# Altium PCB mchf_pro_ui.PcbDoc (part 5 of 7)
Units mil, origin at the board's own origin, x right, y up, seen from the top; angles counter-clockwise.
Board outline 7877.73 x 5661.04 mil, 2 copper layers (Top Layer, Bottom Layer); 345 components, 345 nets, 1318 pads, 783 vias.
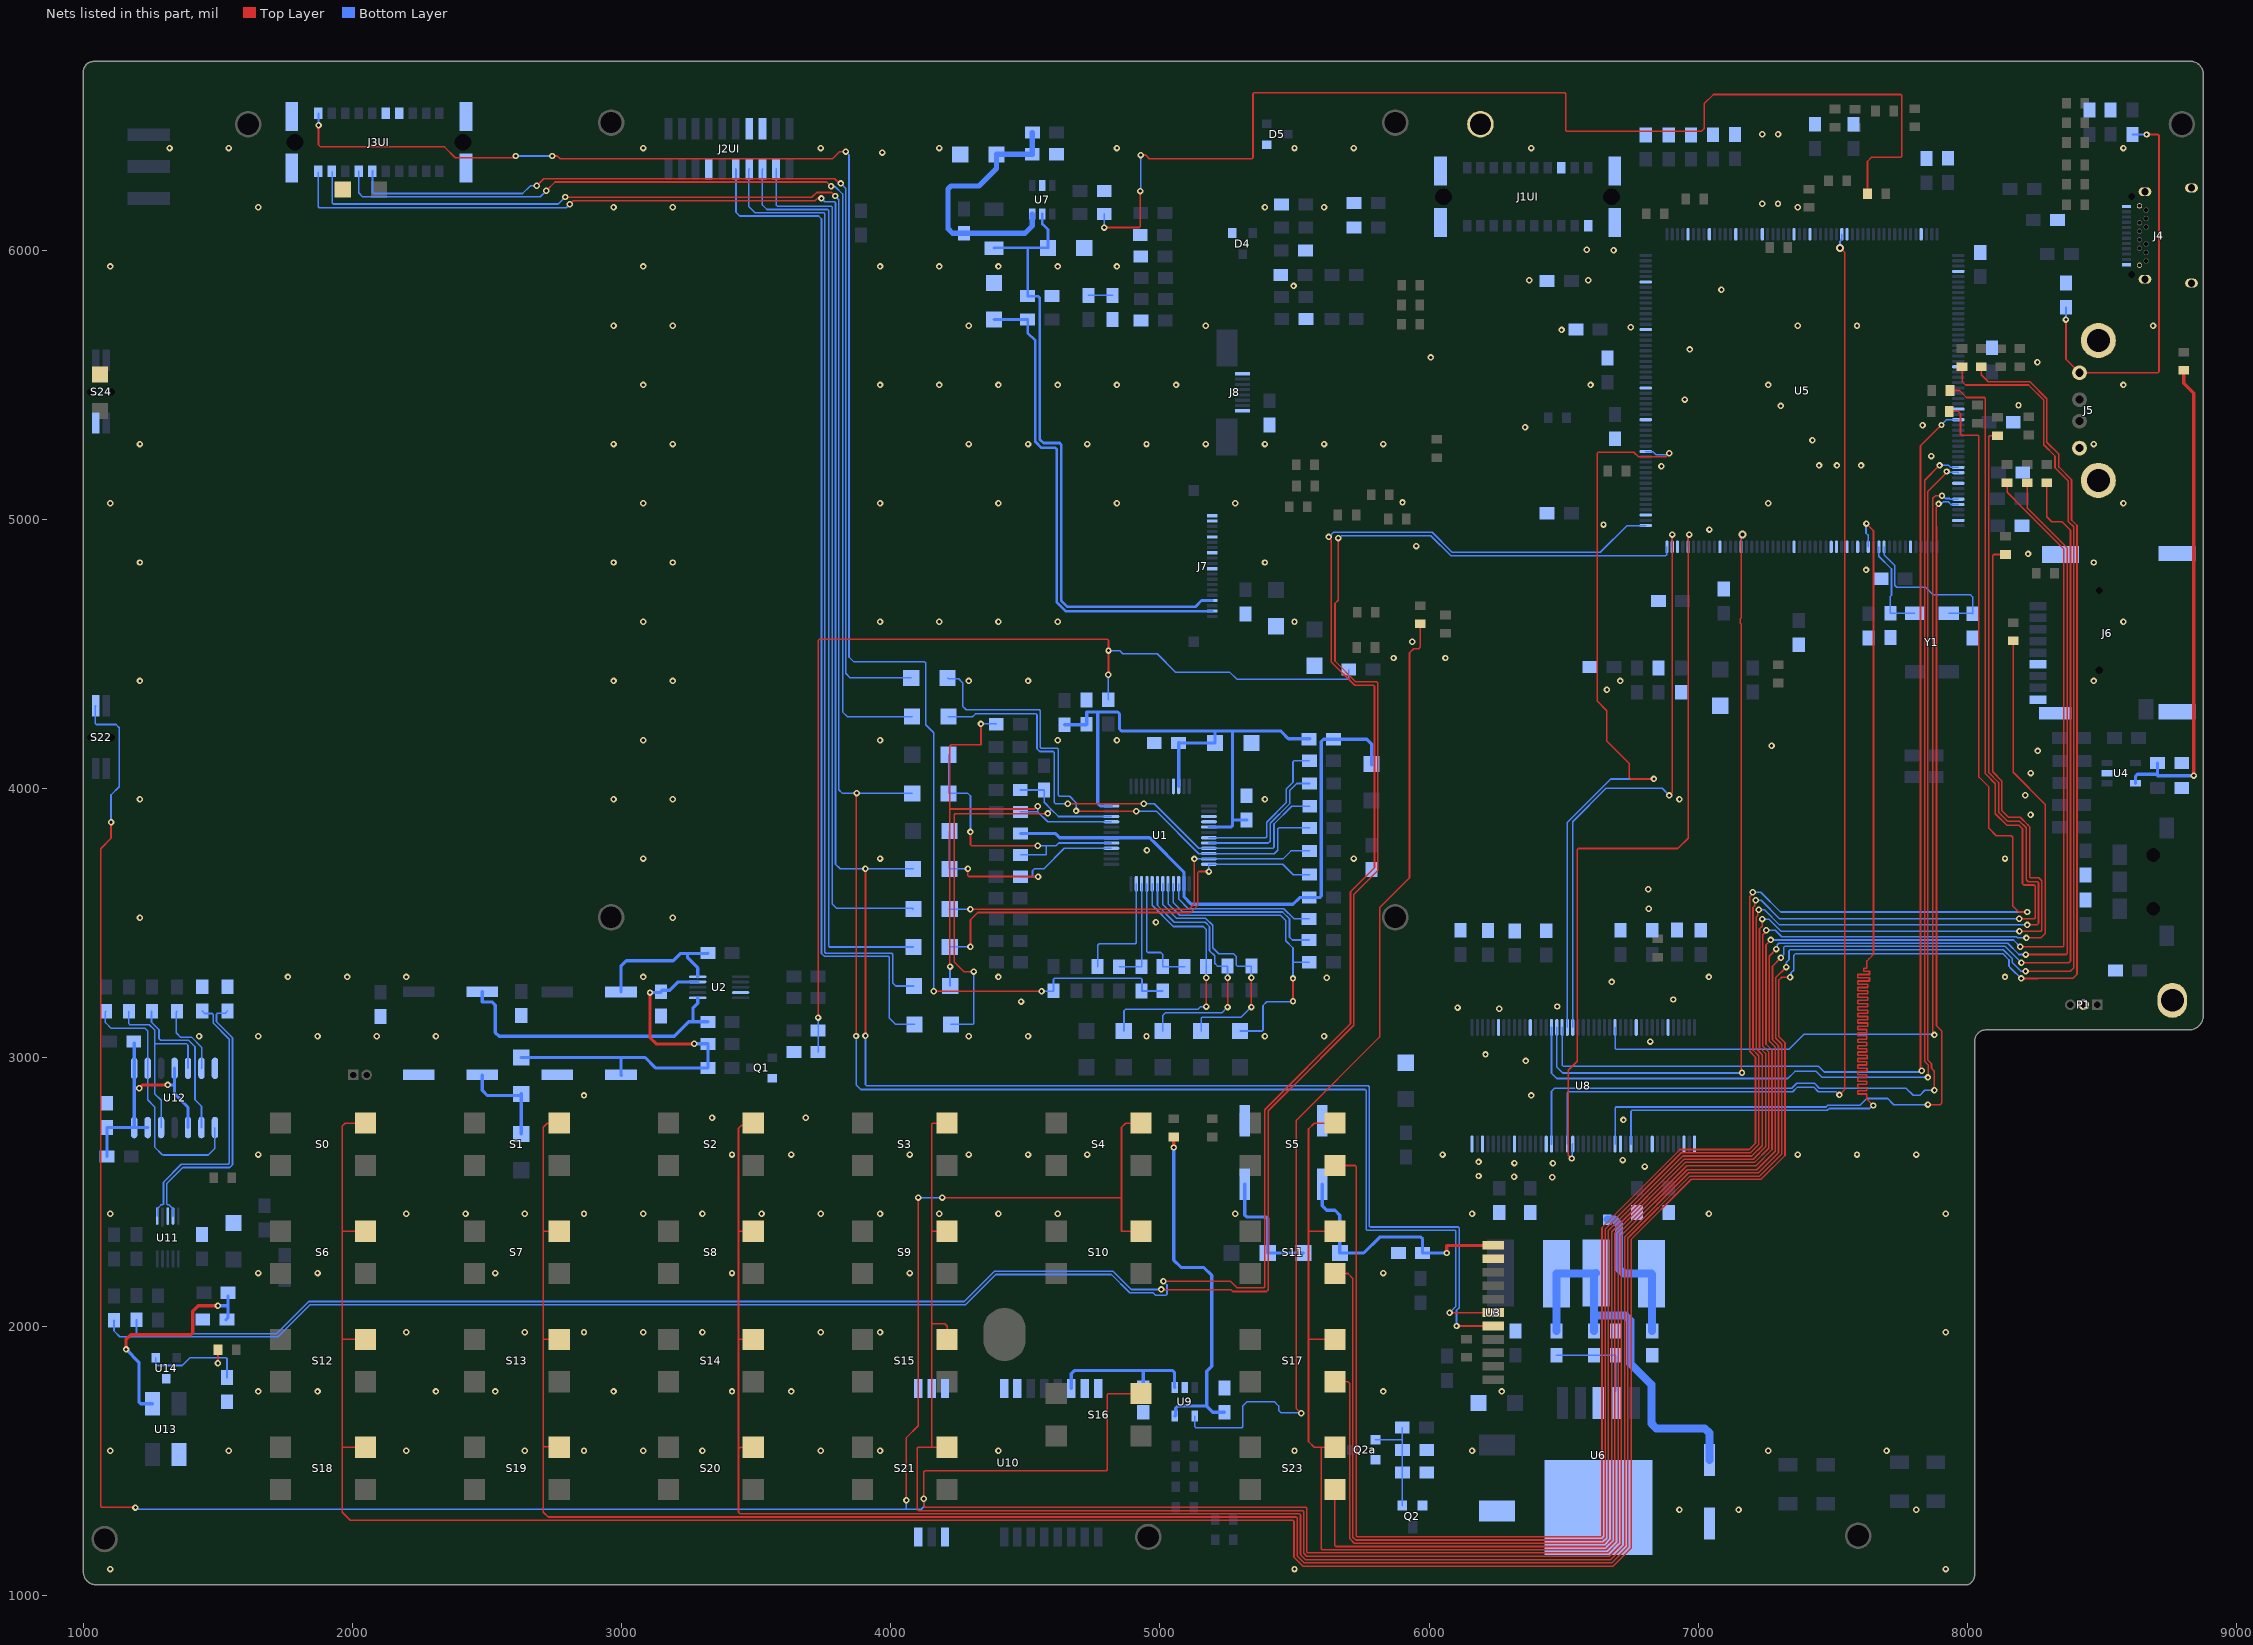
[diagram p4: the nets of this part, all layers, seen from the top]

## Via types
v1: diameter 24, hole 12, Top Layer to Bottom Layer, 779 vias
v2: diameter 30, hole 15, Top Layer to Bottom Layer, 4 vias

## Nets (pads, with @x,y where several pads share a name; then routed paths per layer and width w, separated by ;. In a path a pad name is that pad's centre, name@x,y a point inside that pad or via, vN(x,y) a via of type N, cw(c..) or ccw(c..) an arc to the next point about the centre after c; other vN are vias at no path point) (continued)
FMC_D31: U5.14 U8.56 | length 4731.7
  Top Layer w6: v1(7624.86,4984.78) 7651.35,4958.29 7651.35,3383.92 7634.51,3367.08 7626.52,3359.09 7626.52,3333.02 7614.88,3333.02 7614.88,3321.02 7636.46,3321.02 7636.46,3309.02 7592.45,3309.02 7592.45,3297.02 7636.46,3297.02 7636.46,3285.02 7592.45,3285.02 7592.45,3273.02 7630.42,3273.02 7630.42,3261.02 7592.45,3261.02 7592.45,3249.02 7630.37,3249.02 7630.37,3237.02 7592.45,3237.02 7592.45,3225.02 7630.37,3225.02 7630.37,3213.02 7592.45,3213.02 7592.45,3201.02 7630.37,3201.02 7630.37,3189.02 7592.45,3189.02 7592.45,3177.02 7630.37,3177.02 7630.37,3165.02 7592.45,3165.02 7592.45,3153.02 7630.37,3153.02 7630.37,3141.02 7592.45,3141.02 7592.45,3129.02 7630.37,3129.02 7630.37,3117.02 7592.45,3117.02 7592.45,3105.02 7626.52,3105.02 7626.52,3093.02 7592.45,3093.02 7592.45,3081.02 7626.52,3081.02 7626.52,3069.02 7592.45,3069.02 7592.45,3057.02 7626.81,3057.02 7626.81,3045.02 7592.45,3045.02 7592.45,3033.02 7626.52,3033.02 7626.52,3021.02 7592.45,3021.02 7592.45,3009.02 7628.5,3009.02 7628.5,2997.02 7592.45,2997.02 7592.45,2985.02 7626.52,2985.02 7626.52,2973.02 7592.45,2973.02 7592.45,2961.02 7627.01,2961.02 7627.01,2949.02 7592.45,2949.02 7592.45,2937.02 7626.52,2937.02 7626.52,2925.02 7592.45,2925.02 7592.45,2913.02 7626.52,2913.02 7626.52,2901.02 7592.45,2901.02 7592.45,2889.02 7626.52,2889.02 7626.52,2877.02 7592.45,2877.02 7592.45,2865.02 7626.52,2865.02 7626.52,2862.02 7626.52,2846.23 v1(7650.25,2822.51)
  Bottom Layer w6: U8.56@6750.24,2679.53 6750.24,2801.24 6753.76,2804.76 7479.88,2804.76 7486.48,2811.35 7637.73,2811.35 7648.89,2822.51 v1(7650.25,2822.51) ; v1(7624.86,4984.78) 7623.52,4983.44 7623.52,4949.6 7631.86,4941.27 U5.14@7631.86,4898.21
FMC_NBL0: U5.197 U8.16 | length 3976.8
  Top Layer w6: v1(7853.55,2926.78) 7855.05,2928.28 7855.05,2972.54 7841.47,2986.12 7841.47,5145.64 v1(7896.76,5200.93)
  Bottom Layer w6: U8.16@6454.97,3112.61 6454.97,2942.18 6474.4,2922.74 7332.93,2922.74 7359.34,2949.16 7438.8,2949.16 7461.17,2926.78 7845.26,2926.78 v1@7853.55,2935.07 ; v1(7896.76,5200.93) 7929.64,5200.93 7937.09,5193.48 U5.197@7966.5,5193.48
FMC_NBL1: U5.198 U8.71 | length 4040.1
  Top Layer w6: v1(7877.52,2878.72) 7877.52,2950.07 7867.05,2960.54 7867.05,2977.51 7853.47,2991.1 7853.47,5104.5 7922.76,5173.8 v1(7922.76,5178.11)
  Bottom Layer w6: U8.71@6454.97,2679.53 6454.97,2874.96 6466.36,2886.36 7347.45,2886.36 7366.26,2905.16 7431.88,2905.16 7449.97,2887.07 7772.35,2887.07 7798.86,2860.55 7823.81,2860.55 7841.98,2878.72 v1(7877.52,2878.72) ; v1(7922.76,5178.11) 7925.96,5174.91 7965.39,5174.91 U5.198@7966.5,5173.8
FMC_NBL2: U5.203 U8.28 | length 3389.5
  Top Layer w6: v1(7877.52,3084.57) 7877.52,3089.44 7872.01,3094.96 7872.01,5078.62 7881.42,5088.03 v1(7905.81,5088.03)
  Bottom Layer w6: U8.28@6691.19,3112.61 6691.19,3035.58 6694.7,3032.07 7338.81,3032.07 7394.52,3087.78 7873.52,3087.78 v1@7877.52,3083.78 ; v1(7905.81,5088.03) 7907.95,5088.03 7918.32,5077.66 7933.91,5077.66 7936.2,5075.37 U5.203@7966.5,5075.37
FMC_NBL3: U5.204 U8.59 | length 3693.7
  Top Layer w6: v1(7853.55,2825.76) 7899.55,2825.76 7905.29,2831.5 7905.29,3099.07 7885.45,3118.92 7885.45,4974.62 7884.01,4976.06 7884.01,5045.27 7893.01,5054.27 v1(7893.01,5057.78)
  Bottom Layer w6: U8.59@6691.19,2679.53 6691.19,2813.24 6694.7,2816.76 7474.73,2816.76 7481.33,2823.35 7601.12,2823.35 7626.01,2848.24 7704.03,2848.24 7726.52,2825.76 v1(7853.55,2825.76) ; v1(7893.01,5057.78) 7896.45,5061.23 7907.11,5061.23 7911.54,5065.66 7928.94,5065.66 7938.91,5055.69 U5.204@7966.5,5055.69
FMC_SDCKE0: U5.48 U8.67 | length 2829.8
  Top Layer w6: v1(6529.76,2625.59) 6529.76,2625.86 6517.54,2638.09 6517.54,2953.68 6550.52,2986.66 6550.52,3773.9 6554.04,3777.41 6924.15,3777.41 6962.57,3815.83 6962.57,4940.37 6963.36,4940.37 v1(6966.88,4943.89)
  Bottom Layer w6: v1(6529.76,2625.59) 6532.59,2628.42 6532.59,2678.42 U8.67@6533.71,2679.53 ; U5.48@6962.56,4898.21 6963.68,4899.32 6963.68,4940.68 v1(6966.88,4943.89)
FMC_SDCLK: U5.138 U8.68 | length 4438.6
  Top Layer w6: v1(7524.52,2861.76) 7545.21,2882.44 7545.21,5991.1 v2(7527.52,6008.78)
  Bottom Layer w6: U8.68@6514.02,2679.53 6514.02,2870.24 6517.54,2873.76 7351.82,2873.76 7368.89,2890.82 7429.25,2890.82 7446.32,2873.76 7512.01,2873.76 7524.01,2861.76 v1(7524.52,2861.76) ; v2(7527.52,6008.78) 7526.77,6009.53 7526.77,6033.85 7533.43,6040.51 U5.138@7533.43,6059.62
FMC_SDNCAS: U5.188 U8.18 | length 4003.2
  Top Layer w6: v1@7825.76,2945.78 7825.76,3800.27 7825.76,5273.65 v1@7905.21,5353.09
  Bottom Layer w6: U8.18@6494.34,3112.61 6494.34,2972.43 6497.85,2968.92 7445.99,2968.92 7467.84,2947.07 7828.81,2947.07 v1@7833.52,2951.78 ; v1(7904.04,5350.96) 7904.04,5351.92 7922.76,5370.65 U5.188@7966.5,5370.65
  other v1: 7830.51,2951.91
FMC_SDNE0: U5.51 U8.20 | length 2204.9
  Top Layer w6: v1(6892.35,3974.57) 6903.51,3985.73 v1(6903.51,4943.89)
  Bottom Layer w6: U8.20@6533.71,3112.61 6533.71,3877.23 6657.26,4000.78 6866.14,4000.78 v1(6892.35,3974.57) ; U5.51@6903.51,4898.21 v1(6903.51,4943.89)
FMC_SDNRAS: U5.67 U8.19 | length 2875.1
  Top Layer w6: v1(6835.5,4035.78) 6749.52,4035.78 6743.45,4041.86 6743.45,4093.47 6660.11,4176.81 6660.11,4289.44 6625.52,4324.03 6625.52,5246.66 6629.04,5250.18 6760.56,5250.18 6777.98,5232.75 6879.78,5232.75 v1(6892.76,5245.73)
  Bottom Layer w6: U8.19@6514.02,3112.61 6514.02,3874.52 6675.29,4035.78 v1(6835.5,4035.78) ; U5.67@6805.08,5252.54 6805.43,5252.19 6831.54,5252.19 6843.97,5239.76 6881.91,5239.76 6887.89,5245.73 v1(6892.76,5245.73)
FMC_SDNWE: U5.38 U8.17 | length 2876.6
  Top Layer w6: v2@7159.42,4935.21 7159.62,4935 7159.62,4928.57 7159.42,4928.37 7159.42,4634.12 7156.79,4631.49 7156.79,4614.09 7159.42,4611.46 7159.42,2947.07 v1(7162.74,2943.74)
  Bottom Layer w6: U8.17@6474.65,3112.61 6474.65,2965.62 6496.91,2943.36 7162.35,2943.36 v1(7162.74,2943.74) ; U5.38@7159.42,4898.21 v2@7159.42,4935.21
  other v2: 7164.21,4943.89
GND: C1.2 C14.1 C15.1 C16.2 C17.2 C18.1 C21.1 C21a.2 C21b.2 C22.1 C23.1 C24.2 C25.2 C26.1 C27.1 C28.2 C29.1 C30.2 C31.2 C32.2 C33.1 C34.2 C35.2 C37.2 C38.2 C39.2 C41.1 C42.2 C43.2 C44.2 C45.1 C46.1 C47.2 C48.1 C49.1 C50.2 C51.1 C52.1 C53.1 C54.2 C55.2 C56.1 C61.1 C62.2 CC5.2 CC36.2 CC46.2 Cp7.2 Cp17.2 Cp29.2 CP43.1 CP43E.2 Cp44.2 CP44E.2 Cp49.2 Cp56.2 Cp74.2 Cp80.2 CP89.1 Cp100.2 Cp108.2 Cp114.2 Cp117.2 CP119.2 CP119E.2 Cp133.2 CP140.2 CP152.1 Cp155.2 Cp161.2 Cp179.2 Cp187.2 CP199.1 Cp208.2 Cr1.2 Cr3.2 Cr9.2 Cr15.2 Cr29.2 Cr35.2 Cr41.2 Cr43.2 Cr49.2 Cr55.2 Cr75.2 Cr81.2 D1.1 D2.1 D3.1 D4.1 D5.1 D8.1 J1UI.A3 J1UI.A11 J1UI.MP1 J1UI.MP2 J1UI.MP3 J1UI.MP4 J2UI.A3 J2UI.A4 J2UI.A17 J3UI.A16 J3UI.A17 J3UI.MP1 J3UI.MP2 J3UI.MP3 J3UI.MP4 J4.A1 J4.A12 J4.B1 J4.B12 J4.MH3 J4.MH4 J4.MH5 J4.MH6 J5.1 J5.5 J5.6 J6.6 J6.9 J6.11 J6.12 J6.13 J6.14 J7.10 J7.13 J7.16 J7.19 J7.20 J8.1 J8.8 LD1.2 LD2.2 LD6.2 M1.1 M58a.2 M58b.2 P1.2 pad. pad.1@6191.04,6468.5 Q1.2 Q2.2 Q2a.2 R17.2 R18.1 R22.1 R23.2 R34.1 R35.2 R38.2 R43.1 R46.1 S24.3 U1.3 U1.4 U1.45 U2.4 U3.2 U4.2 U5.6 U5.16 U5.18 U5.20 U5.21 U5.28 U5.42 U5.50 U5.55 U5.73 U5.79 U5.90 U5.99 U5.109 U5.113 U5.118 U5.123 U5.129 U5.132 U5.139 U5.153 U5.160 U5.178 U5.186 U5.200 U5.207 U6.3 U7.2 U8.6 U8.12 U8.32 U8.38 U8.44 U8.46 U8.52 U8.58 U8.72 U8.78 U8.84 U8.86 U9.2 U10.1 U10.2 U10.3 U10.4 U10.5 U10.10 U10.11 U10.20 U10.22 U11.8 U12.7 U13.2 U14.3
  other v1: 1100,1100 5500,1100 7920,1100 6930,1320 7150,1320 7810,1320 1100,1540 1540,1540 2200,1540 2640,1540 2860,1540 3080,1540 3300,1540 3740,1540 3960,1540 4400,1540 5500,1540 6160,1540 7260,1540 7700,1540 1650,1760 1870,1760 2310,1760 2530,1760 2970,1760 3410,1760 3630,1760 5830,1760 6270,1760 2200,1980 2640,1980 2860,1980 3080,1980 3300,1980 3740,1980 3960,1980 7920,1980 1650,2200 1870,2200 2530,2200 3410,2200 4070,2200 5830,2200 1100,2420 2200,2420 2420,2420 2640,2420 2860,2420 3080,2420 3300,2420 3520,2420 3740,2420 3960,2420 4180,2420 4400,2420 4620,2420 5280,2420 6160,2420 7040,2420 7920,2420 6458.1,2556.24 6315.97,2557.86 6184.02,2560.52 6801.02,2595.37 6460.02,2607.59 6317.17,2608.63 6183.97,2612.61 6719.45,2619.57 1650,2640 3410,2640 3630,2640 4070,2640 4290,2640 4510,2640 4730,2640 6050,2640 7370,2640 7590,2640 7810,2640 6722.34,2768.76 3336.05,2776.58 3683.71,2776.58 2860,2860 6380,2860 6359.49,2988.23 6209.64,3012.23 6821.98,3059.89 1430,3080 1650,3080 1870,3080 2090,3080 2310,3080 4290,3080 4510,3080 4950,3080 5390,3080 5610,3080 6260.51,3182.06 6106.06,3186.35 6476.64,3190.28 4484.15,3208.4 6907.32,3216.23 6678.92,3281.6 5619.97,3297.3 1760,3300 1980,3300 2200,3300 3080,3300 4400,3300 7040,3300 8140,3300 4985.2,3503.28 1210,3520 3190,3520 6816.2,3553.89 6814.64,3626.09 3080,3740 3960,3740 5720,3740 8140,3740 4951.56,3771.22 8235.11,3902.44 1210,3960 2970,3960 3190,3960 5390,3960 6930,3960 8215.2,3975.39 8235.66,4057.57 8261.81,4140.07 7272.43,4159.12 3080,4180 3960,4180 4620,4180 4840,4180 6660.9,4366.98 1210,4400 2970,4400 3190,4400 4290,4400 4510,4400 6710,4400 8470,4400 5868.28,4485.11 6060.93,4485.11 5937.36,4545.76 3080,4620 3960,4620 4180,4620 4400,4620 4620,4620 5500,4620 8580,4620 7623.92,4812.32 1210,4840 2970,4840 3190,4840 5390,4840 8470,4840 8225.87,4872 5952.6,4901.18 7041.85,4962.24 6648.11,4980.89 1100,5060 3080,5060 3960,5060 4400,5060 4840,5060 5280,5060 7260,5060 8580,5060 5901.26,5063.07 6863.26,5197.82 7449.33,5200.93 7515.52,5200.93 7605.07,5200.93 7865.58,5235.34 1210,5280 2970,5280 3190,5280 4290,5280 4510,5280 4730,5280 4950,5280 5170,5280 5390,5280 5610,5280 5830,5280 8470,5280 7424.29,5294.35 6356.92,5342.27 7833.71,5349.8 7307.05,5421.86 8190.14,5423.94 6949.99,5445.43 3080,5500 3960,5500 4180,5500 4400,5500 4620,5500 4840,5500 5060,5500 6600,5500 7260,5500 8580,5500 8260.4,5584.47 6006.34,5602.22 6968.52,5631.74 6492.19,5704.21 6749.2,5714.52 2970,5720 3190,5720 4290,5720 5170,5720 7370,5720 7590,5720 8690,5720 7086.37,5853.17 5496.68,5867.81 6372.55,5888.41 6591.4,5888.41 1100,5940 3080,5940 3960,5940 4180,5940 4400,5940 4620,5940 4840,5940 6685.72,6000.62 6586.16,6001.82 1650,6160 2970,6160 3190,6160 5390,6160 5610,6160 7370,6160 7237.74,6172.93 7296.52,6173.07 3968.5,6363.19 1320,6380 1540,6380 3080,6380 3740,6380 4180,6380 4840,6380 5500,6380 5720,6380 6380,6380 8580,6380 7238.16,6431.19 7296.9,6431.21
IMD3_TEST_N: M58b.1 U11.6 | length 1036.6
  Bottom Layer w6: U11.6@1274.04,2411.64 1274.04,2439.2 1287.96,2453.12 1294.05,2453.12 1297.57,2456.64 1297.57,2537.69 1363.89,2604.02 1538.43,2604.02 1541.94,2607.53 1541.94,3068.98 1482.33,3128.59 1482.33,3160.77 1478.82,3164.29 1450.7,3164.29 M58b.1@1441.57,3173.42
IMD3_TEST_P: M58a.1 U11.9 | length 1037
  Bottom Layer w6: U11.9@1333.09,2411.64 1333.09,2439.2 1319.17,2453.12 1313.08,2453.12 1309.57,2456.64 1309.57,2532.72 1368.86,2592.02 1543.4,2592.02 1553.94,2602.56 1553.94,3073.95 1494.33,3133.56 1494.33,3161.39 1497.84,3164.91 1526.57,3164.91 M58a.1@1535.09,3173.42
JC_CLK1: M56.2 U12.5 U12.12 | length 737
  Bottom Layer w6: M56.2@1169.12,3172.67 1169.12,3126.34 1172.63,3122.82 1244.95,3122.82 1264.4,3103.38 1264.4,2865.92 1288.72,2841.6 U12.12@1288.72,2740.46 ; 1264.4,3052.46 1382.86,3052.46 1388.72,3046.6 U12.5@1388.72,2960.46
JC_CLK2: M58.2 U12.6 | length 277.7
  Bottom Layer w6: M58.2@1347.8,3172.67 1344.57,3169.43 1344.57,3092.4 1360.37,3076.6 1401.36,3076.6 1440.09,3037.87 1440.09,2961.82 U12.6@1438.72,2960.46
JC_CLK3: M57.2 U12.9 | length 570.2
  Bottom Layer w6: M57.2@1254.46,3172.67 1253.01,3171.21 1253.01,3131.74 1269.73,3115.02 1281.01,3103.74 1281.01,3070.96 1287.37,3064.6 1390.62,3064.6 1414.53,3040.69 1414.53,2843.62 1438.72,2819.43 U12.9@1438.72,2740.46
JC_CLK4: M55.2 U12.2 U12.8 | length 978.9
  Bottom Layer w6: M55.2@1083.77,3172.67 1081.86,3170.76 1081.86,3130.46 1102.75,3109.57 1228.8,3109.57 1238.72,3099.65 U12.2@1238.72,2960.46 1238.72,2843.83 1264.4,2818.15 1264.4,2668.11 1293.27,2639.24 1296.56,2639.24 1297.34,2638.46 1463.91,2638.46 1488.72,2663.27 U12.8@1488.72,2740.46
KEYPAD_X1: M13.1 S0.3 S6.3 S12.3 S18.3 | length 13012.6
  Top Layer w6: S18.3@2047.64,1552.56 1961.61,1552.56 ; S12.3@2047.64,1953.54 1961.61,1953.54 ; S6.3@2047.64,2355.51 1961.61,2355.51 ; S0.3@2047.64,2756.85 1972.4,2756.85 1961.61,2746.06 1961.61,2355.51 ; v1(7341.54,3299.09) 7341.28,3299.35 7310.52,3299.35 7299.9,3288.73 7299.9,3078.19 7322.39,3055.71 7322.39,2636.87 7233.62,2548.1 6974.41,2548.1 6750.57,2324.26 6750.57,1177.25 6684.44,1111.12 5530.53,1111.12 5498.07,1143.57 5498.07,1277.84 5494.56,1281.35 1991.29,1281.35 1961.61,1311.02 1961.61,1552.56 ; M13.1@8051.83,5567.6 8051.83,5537.46 8077.58,5511.71 8232.56,5511.71 8295.57,5448.7 8295.57,5286.75 8340.32,5242 8340.32,5194.55 8386.92,5147.95 8386.92,4997.64 8407.25,4977.3 8407.25,3310.32 8391.63,3294.7 8261.69,3294.7 8261.45,3294.45 v1(8200.2,3294.45) ; 1961.61,1552.56 1961.61,1953.54 ; 1961.61,1953.54 1961.61,2355.51
  Bottom Layer w6: v1(7341.54,3299.09) 7344.98,3302.53 7344.98,3315.39 7354.81,3325.23 7354.81,3380.12 7361.52,3386.83 8131.27,3386.83 8154.71,3363.39 8154.71,3339.95 8163.69,3330.97 v1(8200.2,3294.45)
KEYPAD_X2: M35.1 S1.3 S7.3 S13.3 S19.3 | length 12173.3
  Top Layer w6: S19.3@2768.31,1552.56 2766.87,1554 2714,1554 2709,1559 ; S13.3@2768.31,1953.54 2709,1953.54 ; S7.3@2768.31,2355.51 2709,2355.51 ; S1.3@2768.31,2756.85 2767.91,2756.45 2723.45,2756.45 2709,2742 2709,2355.51 ; v1(7326.77,3336.61) 7287.9,3297.74 7287.9,3072.85 7310.39,3050.36 7310.39,2641.84 7228.65,2560.1 6969.44,2560.1 6738.57,2329.23 6738.57,1182.22 6679.47,1123.12 5535.5,1123.12 5510.07,1148.54 5510.07,1289.84 5506.56,1293.35 2726.67,1293.35 2709,1311.02 2709,1559 ; M35.1@7980.54,5565.6 7980.54,5512.69 7993.53,5499.71 8227.59,5499.71 8283.57,5443.73 8283.57,5277.8 8325.84,5235.53 8325.84,5192.06 8374.92,5142.98 8374.92,4992.67 8395.25,4972.33 8395.25,3333.39 8382.88,3321.02 v1(8216.54,3321.02) ; 2709,1559 2709,1953.54 ; 2709,1953.54 2709,2355.51
  Bottom Layer w6: v1(7326.77,3336.61) 7327.42,3337.26 7327.42,3353.67 7337.51,3363.76 7337.51,3398.03 7341.03,3401.54 8133.74,3401.54 8166.71,3368.58 8166.71,3354.1 8199.31,3321.49 8216.06,3321.49 v1(8216.54,3321.02)
KEYPAD_X3: M28.1 S2.3 S8.3 S14.3 S20.3 | length 10699.2
  Top Layer w6: S20.3@3488.78,1552.56 3443.56,1552.56 3442.49,1551.49 3437.51,1551.49 3434,1555 ; S14.3@3488.78,1953.54 3434,1953.54 ; S8.3@3488.78,2355.51 3434,2355.51 ; S2.3@3488.78,2756.85 3479.85,2747.92 3443.92,2747.92 3434,2738 3434,2355.51 ; v1(7307.21,3371.09) 7275.9,3339.78 7275.9,3066.9 7298.39,3044.42 7298.39,2646.81 7223.68,2572.1 6964.47,2572.1 6726.57,2334.2 6726.57,1187.19 6674.5,1135.12 5540.47,1135.12 5522.07,1153.52 5522.07,1301.84 5518.56,1305.35 3439.67,1305.35 3434,1311.02 3434,1555 ; v1(8201.14,3352.82) 8377.25,3352.82 8383.25,3358.82 8383.25,4959.61 8351.83,4991.04 8313.96,4991.04 8294.86,5010.14 M28.1@8294.86,5136.62 ; 3434,1555 3434,1953.54 ; 3434,1953.54 3434,2355.51
  Bottom Layer w6: v1(7307.21,3371.09) 7307.21,3373.3 7317.51,3383.61 7317.51,3410.03 7321.02,3413.54 8140.42,3413.54 v1(8201.14,3352.82)
KEYPAD_X4: M29.1 S3.3 S9.3 S15.3 S21.3 | length 10111.6
  Top Layer w6: S21.3@4209.25,1552.56 4209.21,1552.6 4154.86,1552.6 ; S15.3@4209.25,1953.54 4209.25,2001.75 4200,2011 4152.46,2011 ; S9.3@4209.25,2355.51 4152.46,2355.51 ; S3.3@4209.25,2756.85 4155.98,2756.85 4152.46,2753.34 4152.46,2355.51 ; v1(7290.35,3403.78) 7263.9,3377.33 7263.9,3061.93 7286.39,3039.45 7286.39,2652.46 7218.03,2584.1 6959.5,2584.1 6714.57,2339.17 6714.57,1192.16 6669.53,1147.12 5545.44,1147.12 5534.07,1158.49 5534.07,1313.84 5530.56,1317.35 4101.83,1317.35 4098.32,1320.87 4098.32,1549.09 4101.83,1552.6 4154.86,1552.6 ; v1(8216.87,3383.37) 8367.74,3383.37 8371.25,3386.88 8371.25,4894.21 8222.85,5042.61 M29.1@8222.85,5136.62 ; 4152.46,2011 4152.46,1555 4154.86,1552.6 ; 4152.46,2011 4152.46,2355.51
  Bottom Layer w6: v1(7290.35,3403.78) 7293.8,3407.23 7293.8,3419.72 7299.62,3425.54 8149.71,3425.54 8191.88,3383.37 v1(8216.87,3383.37)
KEYPAD_X5: M14.1 S4.3 S10.3 S16.3 S22.1 | length 18183
  Top Layer w6: v1(1102.69,3874.65) 1102.62,3874.57 1102.62,3815.22 1064.2,3776.8 1064.2,1332.83 1067.72,1329.32 1192.34,1329.32 v1(1193.29,1328.37) ; v1(4058.07,1355.32) 4058.07,1588.58 4101.83,1632.35 v1(4101.83,2480.32) ; v1(4190.94,2480.32) 4857.28,2480.32 ; S16.3@4929.72,1751.97 4807.65,1751.97 4804.13,1748.45 4804.13,1469.07 4800.62,1465.55 4126.97,1465.55 4122.7,1461.28 v1(4122.7,1361.22) 4122.7,1335.17 4128.51,1329.35 5542.56,1329.35 5546.07,1325.84 5546.07,1163.46 5549.59,1159.94 6663.68,1159.94 6702.34,1198.6 6702.34,2343.91 6957.37,2598.94 7214.4,2598.94 7274.39,2658.93 7274.39,3028.55 7251.9,3051.04 7251.9,3419.93 v1(7269.51,3437.54) ; S10.3@4929.72,2355.51 4857.28,2355.51 4857.28,2480.32 ; S4.3@4929.72,2756.85 4872.99,2756.85 4857.28,2741.14 4857.28,2480.32 ; M14.1@8147.86,5136.62 8147.86,5100.63 8205.93,5042.56 8358.91,4889.58 8358.91,3415.92 8355.39,3412.4 v1(8196.61,3412.4)
  Bottom Layer w6: S22.1@1046.26,4308.07 1044.29,4306.1 1044.29,4241.7 1047.81,4238.19 1121.06,4238.19 1132.87,4226.38 1132.87,4006.52 1102.69,3976.34 v1(1102.69,3874.65) ; v1(1193.29,1328.37) 1198.16,1328.37 1204.67,1321.85 4058.07,1321.85 ; v1(4058.07,1355.32) 4058.07,1321.85 ; v1(4101.83,2480.32) v1(4190.94,2480.32) ; v1(4122.7,1361.22) 4122.7,1331.36 4113.19,1321.85 4058.07,1321.85 ; v1(7269.51,3437.54) 8171.47,3437.54 v1(8196.61,3412.4)
KEYPAD_X6: M5.1 S5.3 S11.3 S17.3 S23.3 | length 7919.1
  Top Layer w6: S23.3@5650.2,1552.56 5599.36,1552.56 ; S17.3@5650.2,1953.54 5552.17,1953.54 ; S11.3@5650.2,2355.51 5552.17,2355.51 ; S5.3@5650.2,2756.85 5573.78,2756.85 5552.17,2735.24 5552.17,2355.51 ; v1(7252.58,3473.7) 7252.58,3469.35 7239.9,3456.67 7239.9,3043.34 7262.39,3020.85 7262.39,2663.9 7209.43,2610.94 6952.4,2610.94 6690.34,2348.88 6690.34,1203.57 6658.71,1171.94 5602.88,1171.94 5599.36,1175.46 5599.36,1552.56 ; M5.1@8170.21,4549.21 8170.21,4060.24 8289.76,3940.69 8289.76,3461.63 8273.19,3445.07 v1(8219.59,3445.07) ; 5552.17,1953.54 5552.17,2355.51 ; 5552.17,1953.54 5552.17,1573.82 5573.43,1552.56 5599.36,1552.56
  Bottom Layer w6: v1(7252.58,3473.7) 7286.76,3473.7 7310.91,3449.54 8182.75,3449.54 8187.23,3445.07 v1(8219.59,3445.07)
KEYPAD_Y1: M12.1 S5.4 | length 8297.9
  Top Layer w6: S5.4@5650.2,2599.37 5725.37,2599.37 5728.89,2595.86 5728.89,1223.46 5732.4,1219.94 6638.82,1219.94 6642.34,1223.46 6642.34,2368.76 6932.52,2658.94 7189.55,2658.94 7212.89,2682.29 7212.89,3002.23 7191.55,3023.57 7191.55,3598.6 7202.94,3610 v1(7202.94,3614.87) ; M12.1@7932.96,5401.57 7966.26,5401.57 7968.97,5398.86 7974.76,5393.08 7974.76,5316.09 7978.27,5312.58 8039.59,5312.58 8043.1,5309.06 8043.1,4042.66 8080.17,4005.6 8080.17,3852.29 8107.45,3825.01 8163.18,3825.01 8168.96,3819.23 8168.96,3563.9 8191.47,3541.38 v1(8222.86,3541.38)
  Bottom Layer w6: v1(7202.94,3614.87) 7232.64,3614.87 7306.13,3541.38 v1(8222.86,3541.38)
KEYPAD_Y2: M33.1 S11.4 | length 8014.7
  Top Layer w6: S11.4@5650.2,2198.03 5698.57,2198.03 5716.89,2179.71 5716.89,1218.49 5727.43,1207.94 6643.79,1207.94 6654.34,1218.49 6654.34,2363.79 6937.49,2646.94 7194.52,2646.94 7224.89,2677.32 7224.89,3007.2 7203.55,3028.54 7203.55,3558.07 7210.49,3565.01 7210.49,3581.38 v1(7213.93,3584.82) ; M33.1@7935.58,5479.05 7970.89,5479.05 7996.97,5452.98 8063.59,5452.98 8067.1,5449.46 8067.1,4054.82 8104.17,4017.76 8104.17,3906.85 8147.66,3863.36 8192.06,3863.36 8204.96,3850.46 8204.96,3646.54 8209.93,3641.57 8248.81,3641.57 8252.33,3638.05 8252.33,3520.16 8248.81,3516.65 v1(8192.96,3516.65)
  Bottom Layer w6: v1(7213.93,3584.82) 7233.99,3584.82 7302.16,3516.65 v1(8192.96,3516.65)
KEYPAD_Y3: M37.1 S17.4 | length 7377.3
  Top Layer w6: S17.4@5650.2,1796.06 5698.57,1796.06 5704.89,1789.74 5704.89,1213.52 5722.46,1195.94 6648.76,1195.94 6666.34,1213.52 6666.34,2358.82 6942.46,2634.94 7199.49,2634.94 7237.91,2673.36 7237.91,3011.15 7215.9,3033.15 7215.9,3522.78 7221.49,3528.37 7221.49,3546.31 v1(7224.55,3549.37) ; M37.1@8112.16,5311.59 8083.02,5311.59 8079.1,5307.67 8079.1,4059.79 8116.17,4022.73 8116.17,3911.82 8149.03,3878.96 8194.12,3878.96 8218.42,3854.66 8218.42,3661.5 8226.35,3653.57 8260.81,3653.57 8264.33,3650.05 8264.33,3499.05 8258.78,3493.5 v1(8222.21,3493.5)
  Bottom Layer w6: v1(7224.55,3549.37) 7246.16,3549.37 7302.03,3493.5 v1(8222.21,3493.5)
KEYPAD_Y4: M36.1 S23.4 | length 6573.8
  Top Layer w6: S23.4@5650.2,1395.08 5650.2,1187.46 5653.71,1183.94 6653.74,1183.94 6678.34,1208.54 6678.34,2353.85 6947.43,2622.94 7204.46,2622.94 7250.39,2668.87 7250.39,3015.64 7227.9,3038.13 7227.9,3478.72 7237.91,3488.73 v1(7237.91,3515.09) ; M36.1@8141.61,4869.79 8097.86,4869.79 8094.11,4866.03 8094.11,4062.15 8128.3,4027.96 8128.3,3918.35 8153.26,3893.39 8196.66,3893.39 8225.56,3864.5 8231.33,3858.73 8231.33,3672.38 8234.84,3668.86 8265.41,3668.86 8276.33,3657.94 8276.33,3473.56 8272.81,3470.05 v1(8193.49,3470.05)
  Bottom Layer w6: v1(7237.91,3515.09) 7262.33,3515.09 7306.88,3470.54 8192.99,3470.54 v1(8193.49,3470.05)
LCD_BL_A: C44.1 C45.2 D11.2 J7.4 U7.5 | length 2334.6
  Bottom Layer w10: D11.2@4383.71,6008.41 4384.29,6008.99 4508.44,6008.99 ; U7.5@4562.99,6134.97 4562.99,6097.57 4583.74,6076.83 C44.1@4583.74,6008.99 4508.44,6008.99 ; J7.4@5193.86,4698.82 5154.51,4698.82 5131.16,4675.47 4656.45,4675.47 4633.1,4698.82 4633.1,5278.02 4627.24,5283.88 4567.31,5283.88 4553.15,5298.04 4553.15,5823.81 4547.29,5829.67 C45.2@4508.44,5829.67 4508.44,6008.99
LCD_BL_CTRL: M44.1 R42.1 | length 4259.6
  Top Layer w6: v1(4793.31,6084.65) 4923.22,6084.65 4926.73,6088.16 v1(4926.73,6220.11) ; v1(4928.52,6353.95) 4946.8,6353.95 4960.63,6340.12 5342.22,6340.12 5345.74,6343.63 5345.74,6581.48 5349.25,6585 6504.16,6585 6507.67,6581.48 6507.67,6445.5 6511.19,6441.98 7012.37,6441.98 7022.91,6452.53 7022.91,6545.56 7056.49,6579.14 7753.01,6579.14 7756.52,6575.63 7756.52,6348.8 7753.01,6345.29 7644.15,6345.29 7629.15,6330.29 M44.1@7629.15,6210.41
  Bottom Layer w6: v1(4793.31,6084.65) R42.1@4793.31,6134.97 ; v1(4926.73,6220.11) 4928.52,6221.9 v1(4928.52,6353.95)
LCD_BL_K: J7.2 R45.2 R46.2 | length 1841.4
  Bottom Layer w10: R46.2@4383.71,5743.24 R45.2@4508.44,5743.24 4508.44,5693.3 4537.15,5664.59 4537.15,5288.64 4559.57,5266.22 4611.24,5266.22 4617.1,5260.36 4617.1,4692.19 4649.85,4659.45 J7.2@5193.86,4659.45
LCD_VDD: C41.2 C42.1 RFC5.2 RFC6.1 U7.6 | length 1000.8
  Bottom Layer w20: U7.6@4525.59,6134.97 4525.59,6091.17 4497.83,6063.41 RFC6.1@4271.65,6063.41 4229.68,6063.41 4212.5,6080.59 4212.5,6227.46 4224.22,6239.17 4327.76,6239.17 4392.84,6304.26 C42.1@4392.84,6356.65 4392.93,6356.73 C41.2@4525.59,6356.73 4525.81,6356.96 4525.81,6437.45 RFC5.2@4526.04,6437.68
LINE_IN_L: C10.2 J3UI.A4 | length 4115.2
  Top Layer w6: v1(2719.49,6221.26) 2752.16,6253.94 3761.75,6253.94 v1(3778.04,6237.65)
  Bottom Layer w6: J3UI.A4@2023.03,6293.31 J3UI.A4@2023.03,6293.31 2022.98,6213.38 2037.35,6199.01 2697.83,6199.01 2719.49,6220.66 v1(2719.49,6221.26) ; v1(3778.04,6237.65) 3779.43,6236.26 3793.79,6236.26 3820.83,6209.22 3820.83,4284.49 3837.85,4267.47 C10.2@4078.84,4267.47
LINE_IN_R: C11.2 J3UI.A5 | length 3930.1
  Top Layer w6: v1(2684.06,6240.16) 2710.26,6266.36 3791.52,6266.36 3809.18,6248.71 v1(3814.05,6248.71)
  Bottom Layer w6: J3UI.A5@2074.12,6294.61 2074.12,6214.52 2077.63,6211.01 2631.89,6211.01 2661.04,6240.16 v1(2684.06,6240.16) ; v1(3814.05,6248.71) 3832.83,6229.92 3832.83,4428.18 3849.84,4411.17 C11.2@4075.89,4411.17
LINE_OUT_L: C4.2 J3UI.A1 U3.7 | length 8861
  Top Layer w6: v1(2807.2,6171.26) 2820.22,6184.28 3718.55,6184.28 3727.25,6192.98 v1(3742,6192.98) ; v1(3905.9,3081.44) v1(3905.9,3701.82) ; v1(6102.03,2003.15) U3.7@6238.19,2003.15
  Bottom Layer w6: J3UI.A1@1873.03,6289.95 1873.03,6161.98 1876.55,6158.46 2794.41,6158.46 v1(2807.2,6171.26) ; v1(3742,6192.98) 3754.55,6180.44 3791.21,6180.44 3794.72,6176.92 3794.72,3718.97 3811.87,3701.82 v1(3905.9,3701.82) C4.2@4082.59,3701.82 ; v1(3905.9,3081.44) 3905.9,2899.25 3909.41,2895.73 5774.04,2895.73 5778.1,2891.68 5778.1,2374.32 5781.62,2370.8 6108.15,2370.8 6111.66,2367.29 6111.66,2274.36 6111.66,2070.89 6102.03,2061.26 v1(6102.03,2003.15)
LINE_OUT_R: C5.2 J3UI.A2 U3.6 | length 8816.4
  Top Layer w6: v1(2790.49,6198.14) 2791.81,6196.82 3706.42,6196.82 3724.36,6214.75 3780.34,6214.75 v1(3793.32,6201.77) ; v1(3871.06,3080.71) 3872.12,3081.76 3872.12,3982.25 v1(3873.17,3983.31) ; v1(6076,2052.2) 6237.24,2052.2 U3.6@6238.19,2053.15
  Bottom Layer w6: J3UI.A2@1924.21,6290.79 1924.21,6175.76 1927.73,6172.24 2764.6,6172.24 v1(2790.49,6198.14) ; v1(3793.32,6201.77) 3807.04,6188.05 3807.04,3995.16 3820.16,3982.04 C5.2@4079.64,3982.04 ; v1(3871.06,3080.71) 3871.06,2899.61 3888.78,2881.89 5762.59,2881.89 5766.1,2878.37 5766.1,2361.81 5769.62,2358.3 6096.15,2358.3 6099.66,2354.78 6099.66,2075.86 v1(6076,2052.2)
LO_SCL: R51.2 U5.52 | length 8748
  Top Layer w6: v1(5005.17,2138.88) 5005.8,2138.25 5263.8,2138.25 5270.66,2131.39 5395.77,2131.39 5402.56,2138.17 5402.56,2802.56 5597.44,2997.44 5597.44,2998.03 5720.2,3120.79 5720.2,3606.07 5809.58,3695.45 5809.58,4392.82 5806.07,4396.34 5728,4396.34 5650.37,4473.97 5650.37,4687.76 5662.37,4699.76 v1(5662.37,4930.92)
  Bottom Layer w6: R51.2@1197.33,2026.6 1197.33,1978.58 1200.84,1975.07 1717.94,1975.07 1837.19,2094.32 4272.65,2094.32 4385.02,2206.69 4825.79,2206.69 4893.6,2138.88 v1(5005.17,2138.88) ; v1(5662.37,4930.92) 5666.14,4930.92 5674.88,4939.66 6006.59,4939.66 6080.43,4865.82 6879.2,4865.82 6882.71,4869.34 6882.71,4897.09 U5.52@6883.82,4898.21
LO_SDA: R52.2 U5.53 | length 8854.6
  Top Layer w6: v1(5012.8,2169.29) 5262.17,2169.29 5286.1,2145.36 5385.6,2145.36 5389.11,2148.87 5389.11,2806.67 5708.2,3125.76 5708.2,3616.4 5797.28,3705.49 5797.28,4380.05 5793.77,4383.56 5723.8,4383.56 5636.83,4470.54 5636.83,4922.4 5627.54,4931.7 v1(5627.54,4934.92)
  Bottom Layer w6: R52.2@1113.64,2024.6 1113.64,1984.78 1135.36,1963.07 1722.91,1963.07 1842.16,2082.32 4277.62,2082.32 4389.88,2194.58 4819.78,2194.58 4887.48,2126.88 4974.49,2126.88 4983.58,2117.8 5022.75,2117.8 5026.27,2121.32 5026.27,2155.82 v1(5012.8,2169.29) ; v1(5627.54,4934.92) 5644.54,4951.92 6011.3,4951.92 6085.4,4877.82 6636.02,4877.82 6735.15,4976.95 U5.53@6805.08,4976.95
LORA_POWER: M17.1 U9.4 | length 3689.9
  Top Layer w6: v1@5524.06,1678.93 5506.28,1696.71 5506.28,2766.67 5816.2,3076.58 5816.2,3557.07 5927.35,3668.23 5927.35,4504.34 5942.77,4519.76 5961.43,4519.76 5967.52,4525.85 M17.1@5967.52,4611.76
  Bottom Layer w6: U9.4@5129.92,1668.31 5129.92,1628.81 5133.44,1625.29 5303.88,1625.29 5307.4,1628.81 5307.4,1705.52 5323.62,1721.74 5425.28,1721.74 5440.8,1706.22 5440.8,1690.11 5449.8,1681.1 5522.51,1681.1 v1(5524.68,1678.93)
MIC_IN: C12.2 C13.2 J3UI.A11 R2.1 | length 6466.4
  Top Layer w6: v1(1873.72,6464.79) 1873.72,6391.79 1881.35,6384.16 2341.54,6384.16 2381.44,6344.26 2595.29,6344.26 2601.43,6350.39 v1(2606.3,6350.39) ; v1(2742.13,6350.39) 2761.02,6350.39 2771.29,6340.12 3783.03,6340.12 3809.61,6366.7 v1(3832.7,6366.7) ; v1(4159.55,3247.31) v1(4560.18,3247.31)
  Bottom Layer w6: J3UI.A11@1873.03,6509.84 1873.72,6509.16 v1(1873.72,6464.79) ; v1(2606.3,6350.39) v1(2742.13,6350.39) ; v1(3832.7,6366.7) 3832.7,6366.3 3844.83,6354.17 3844.83,4488.78 3863,4470.61 4126.43,4470.61 4129.94,4467.09 4129.94,4236.76 4159.55,4207.15 v1(4159.55,3247.31) ; v1(4560.18,3247.31) 4603.23,3247.31 R2.1@4604.6,3248.68 4604.6,3291.04 4608.12,3294.56 4929.75,3294.56 4933.26,3291.04 4933.26,3249.16 C13.2@4931.87,3247.77 5009.7,3247.77 C12.2@5010.61,3248.68
MUTE: C15.2 R1.1 R8.2 R31.2 | length 3803.4
  Top Layer w6: v1(3729.76,3148.96) 3729.76,4549.52 3734.43,4554.19 4805.4,4554.19 4808.91,4550.67 v1(4808.91,4512.77) 4808.89,4423.88 v1(4808.32,4423.3)
  Bottom Layer w6: C15.2@3729.76,3021.17 R8.2@3729.76,3100.91 v1(3729.76,3148.96) ; R1.1@4807.94,4330.3 4808.88,4331.24 4807.94,4332.18 4808.32,4332.56 v1(4808.32,4423.3) ; v1(4808.91,4512.77) 4850.2,4512.77 4862.19,4500.78 4989.51,4500.78 5058.67,4431.62 5260.04,4431.62 5285.95,4405.71 5697.82,4405.71 5701.34,4409.23 R31.2@5701.34,4441.93
NetC1_1: C1.1 CC5.1 CC36.1 CC46.1 M0.1 RFC1.1 U1.5 U1.36 U1.46 | length 2261.1
  Bottom Layer w12: M0.1@4644.93,4237.51 4726.29,4237.51 CC36.1@4727.68,4238.9 4727.68,4284.49 4768.6,4284.49 ; U1.36@4819.67,3935.5 4778.82,3935.5 4768.6,3945.72 4768.6,4284.49 ; CC46.1@5068.81,4169.14 CC46.1@5069.67,4170 ; U1.46@5069.67,4008.33 5069.67,4168.92 C1.1@5204.81,4168.92 5204.81,4214.42 ; U1.5@5181.87,3856.76 5263.07,3856.76 5270.1,3863.79 5270.1,4214.42 ; 5270.76,3883.54 CC5.1@5322.17,3883.54 ; RFC1.1@5556.32,4185.42 5477.25,4185.42 5451.77,4210.9 5448.25,4214.42 5270.1,4214.42 ; 4768.6,4284.49 4842.69,4284.49 4849.72,4277.46 4849.72,4221.45 4856.75,4214.42 5204.81,4214.42 ; 5204.81,4214.42 5270.1,4214.42
NetC2_1: C2.1 C4.1 CC28.2 U1.28 | length 913.1
  Top Layer w6: v1(4286.52,3701.92) 4286.52,3676.74 4290.03,3673.23 4546.54,3673.23 v1(4547.35,3672.41)
  Bottom Layer w6: C2.1@4217.59,3841.94 C4.1@4217.59,3701.82 4217.69,3701.92 v1(4286.52,3701.92) ; CC28.2@4481.39,3672.41 4526.5,3672.41 ; v1(4547.35,3672.41) 4526.5,3672.41 ; U1.28@4819.67,3778.02 4644.93,3778.02 4569.13,3702.22 4533.59,3702.22 4526.5,3695.13 4526.5,3672.41
NetC3_1: C3.1 C5.1 CC29.2 U1.29 | length 1068.5
  Top Layer w6: v1(4296.01,3838.88) 4296.01,3790.92 4299.52,3787.41 v1(4546.26,3787.41)
  Bottom Layer w6: C3.1@4214.64,4125.94 C5.1@4214.64,3982.04 4286.52,3982.04 4296.01,3972.55 v1(4296.01,3838.88) ; CC29.2@4482.19,3753.76 4576.01,3753.76 4577.96,3755.71 4577.96,3787.41 ; v1(4546.26,3787.41) 4577.96,3787.41 ; U1.29@4819.67,3797.71 4624.29,3797.71 4613.99,3787.41 4577.96,3787.41
NetC6_1: C6.1 CC33.1 R3.1 U1.33 | length 1850.3
  Top Layer w6: v1(4220.03,3338.7) 4219.49,3339.25 4219.49,3924.22 ; v1(4335,4240.21) 4335,4162.4 4224.41,4162.4 4219.49,4157.48 4219.49,3924.22 ; v1(4546.26,3934.66) 4544.19,3934.66 4533.75,3924.22 4219.49,3924.22
  Bottom Layer w6: v1(4220.03,3338.7) 4220.03,3267.18 C6.1@4220.73,3266.48 ; v1(4335,4240.21) 4390.56,4240.21 R3.1@4391.87,4238.9 ; CC33.1@4481.43,3913.2 4546.26,3913.2 ; v1(4546.26,3934.66) 4546.26,3913.2 ; U1.33@4819.67,3876.45 4583.01,3876.45 4546.26,3913.2
NetC6_2: C6.2 J2UI.A14 | length 3622.9
  Bottom Layer w6: J2UI.A14@3473.82,6301.97 3472.56,6300.71 3472.56,6162.47 3495.57,6139.46 3751.51,6139.46 3755.02,6135.95 3755.02,3391.98 3758.54,3388.47 4003.23,3388.47 4006.89,3384.8 4006.89,3277.56 4017.97,3266.48 C6.2@4085.73,3266.48
NetC7_1: C7.1 CC34.1 R4.1 U1.34 | length 1688.1
  Top Layer w6: v1(4308.07,3319.88) 4272.34,3319.88 4236.22,3356.01 4236.22,3903.17 4239.74,3906.69 4582.03,3906.69 v1(4582.84,3907.5)
  Bottom Layer w6: C7.1@4223.68,3123.77 4304.56,3123.77 4308.07,3127.28 v1(4308.07,3319.88) ; CC34.1@4481.33,3994.75 4569.48,3994.75 R4.1@4569.89,3995.16 4569.89,3949.08 4596.38,3922.59 ; v1(4582.84,3907.5) 4582.84,3909.05 4596.38,3922.59 ; U1.34@4819.64,3896.1 4622.87,3896.1 4596.38,3922.59
NetC7_2: C7.2 J2UI.A15 | length 3806.1
  Bottom Layer w6: J2UI.A15@3423.82,6301.97 3424.89,6300.9 3424.89,6141.05 3438.48,6127.46 3731.71,6127.46 3742.64,6116.54 3742.64,3387.39 3753.57,3376.47 3991.38,3376.47 3994.89,3372.95 3994.89,3146.84 4017.97,3123.77 C7.2@4088.68,3123.77
NetC8_1: C8.1 CC11.2 U1.11 | length 1525.8
  Top Layer w6: v1(4296.01,3551.92) 5107.89,3551.92 5127.95,3571.98 v1(5127.95,3738.65)
  Bottom Layer w6: C8.1@4217.59,3553.14 C8.1@4218.81,3551.92 v1(4296.01,3551.92) ; v1(5127.95,3738.65) U1.11@5181.87,3738.65 5457.43,3738.65 5487.16,3768.38 CC11.2@5555.57,3768.38
NetC8_2: C8.2 J2UI.A12 | length 3244.4
  Bottom Layer w6: J2UI.A12@3573.82,6301.97 3574.47,6301.31 3574.47,6167.77 3577.99,6164.26 3779.14,6164.26 3782.65,6160.74 3782.65,3570.87 3797.87,3555.65 4080.08,3555.65 C8.2@4083.81,3551.92
NetC9_1: C9.1 CC12.2 U1.12 | length 1626
  Top Layer w6: v1(4296.01,3412.15) 4296.01,3512.54 4323.01,3539.55 5113.96,3539.55 5139.95,3565.55 5139.95,3686.54 5145.14,3691.73 v1(5182.01,3691.73)
  Bottom Layer w6: C9.1@4218.81,3411.51 4219.45,3412.15 v1(4296.01,3412.15) ; v1(5182.01,3691.73) 5182.01,3718.82 U1.12@5181.87,3718.97 5456.54,3718.97 5495.2,3680.3 CC12.2@5555.57,3680.3
NetC9_2: C9.2 J2UI.A13 | length 3437.7
  Bottom Layer w6: J2UI.A13@3523.82,6301.97 3523,6301.15 3523,6168.32 3539.72,6151.6 3765.2,6151.6 3768.72,6148.09 3768.72,3415.03 3772.23,3411.51 C9.2@4083.81,3411.51
NetC10_1: C10.1 CC9.1 U1.9 | length 1852.1
  Top Layer w6: v1(4657.16,3943.72) v1(4939.72,3943.7)
  Bottom Layer w6: C10.1@4213.84,4267.47 4304.56,4267.47 4314.55,4277.46 4539.81,4277.46 4543.33,4273.95 4543.33,4147.64 4553.16,4137.81 4604.02,4137.81 4607.53,4134.29 4607.53,3948.18 4611.99,3943.72 v1(4657.16,3943.72) ; v1(4939.72,3943.7) 4978.71,3943.7 5144.39,3778.02 5420.35,3778.02 5423.86,3781.53 5423.86,3868.22 5490.17,3934.52 CC9.1@5556.32,3934.52
NetC11_1: C11.1 CC10.1 U1.10 | length 1950.1
  Top Layer w6: v1(4688.39,3917.2) 4689.18,3916.41 4911.46,3916.41 v1(4912.24,3915.63)
  Bottom Layer w6: C11.1@4210.89,4411.17 4214.22,4407.84 4251.97,4407.84 4266.73,4393.08 4266.73,4306.1 4279.81,4293.02 4551.81,4293.02 4555.33,4289.51 4555.33,4153.32 4558.84,4149.81 4619.37,4149.81 4622.88,4146.29 4622.88,3974.85 4626.4,3971.34 4664.49,3971.34 4688.39,3947.43 v1(4688.39,3917.2) ; v1(4912.24,3915.63) 4986.97,3915.63 5144.27,3758.34 5424.58,3758.34 5437.46,3771.22 5437.46,3850.27 5440.98,3853.78 CC10.1@5555.92,3853.78
NetC12_1: C12.1 CC21.1 U1.21 | length 442.8
  Bottom Layer w6: U1.21@4951.56,3646.13 4951.56,3394.64 4955.07,3391.12 5003.45,3391.12 5009.87,3384.7 5010.61,3384.7 C12.1@5010.61,3338.68 5090.14,3338.68 5091.05,3337.77 CC21.1@5091.96,3338.68
NetC13_1: C13.1 CC22.1 U1.22 | length 392
  Bottom Layer w6: CC22.1@4848.26,3337.77 C13.1@4931.87,3337.77 U1.22@4931.87,3646.13
NetC16_1: C16.1 C18.2 R9.1 R10.1 R15.2 U2.9 | length 1450.9
  Top Layer w12: v1(3105.32,3242.13) 3105.32,3074.52 3128.45,3051.39 3269.42,3051.39 v1(3269.87,3051.84)
  Bottom Layer w12: R15.2@2626.97,3000.74 2997.05,3000.74 ; C16.1@2998.18,2935.04 C16.1@2997.19,2936.03 2997.19,3000.59 2997.05,3000.74 ; v1(3105.32,3242.13) 3142.63,3242.13 3150.99,3250.49 3179.36,3250.49 3210.37,3281.5 U2.9@3282.48,3281.5 ; v1(3269.87,3051.84) 3319.77,3051.84 R10.1@3320.43,3051.18 R9.1@3320.43,2962.15 3125.44,2962.15 3086.86,3000.74 2997.05,3000.74
NetC17_1: C17.1 R15.1 R16.2 | length 361.9
  Bottom Layer w12: C17.1@2482.28,2936.03 2482.28,2878.4 2501.43,2859.25 2620.48,2859.25 R15.1@2626.97,2865.74 R16.2@2626.97,2716.75
NetC19_1: C19.1 R13.1 U2.10 | length 540.2
  Bottom Layer w12: C19.1@2997.05,3244.09 2997.05,3339.57 3017.72,3360.24 3190.94,3360.24 3217.52,3386.81 3245.08,3386.81 ; U2.10@3282.48,3301.18 3282.48,3333.66 3245.08,3371.06 3245.08,3386.81 ; R13.1@3320.43,3388.47 3318.78,3386.81 3245.08,3386.81
NetC20_1: C20.1 R14.1 U2.6 | length 1108.1
  Bottom Layer w12: C20.1@2482.28,3245.38 2482.28,3206.92 2518.85,3206.92 2530.69,3195.08 2530.69,3093.33 2544.43,3079.59 3195.73,3079.59 3249.36,3133.22 3263.78,3133.22 ; U2.6@3282.48,3222.44 3282.48,3201.77 3264.76,3184.06 3264.76,3134.2 3263.78,3133.22 ; R14.1@3320.43,3133.22 3263.78,3133.22
NetC21_2: C21.2 C21b.1 R19b.2 U3.1 | length 978
  Top Layer w12: v1(6065.52,2274.36) 6065.52,2302.17 6238.19,2302.17 U3.1@6238.68,2302.66
  Bottom Layer w12: C21b.1@5603.35,2529.53 5603.35,2449.91 5619.97,2433.29 5650.53,2433.29 5668.46,2415.36 R19b.2@5668.46,2274.36 5756.64,2274.36 5815.94,2333.66 5968.83,2333.66 5975.86,2326.63 C21.2@5975.86,2274.36 v1(6065.52,2274.36)
NetC21a_1: C21a.1 R19a.2 R19b.1 | length 465.1
  Bottom Layer w12: C21a.1@5315.28,2529.53 5315.28,2415.36 5322.31,2408.33 5393.5,2408.33 5400.53,2401.3 R19a.2@5400.53,2274.36 R19b.1@5533.46,2274.36
NetC26_2: C26.2 J5.4 RFC2.2 | length 1539.2
  Top Layer w6: v1(8366.51,5742.6) 8366.51,5595.49 J5.4@8416.94,5545.05 8708.42,5545.05 8711.94,5548.57 8711.94,5940.21 8712.04,5940.32 8712.04,6331.96 8711.94,6332.06 8711.94,6426.77 8708.42,6430.29 v1(8666,6430.29)
  Bottom Layer w6: C26.2@8366.23,5788.08 8366.51,5787.8 v1(8366.51,5742.6) ; RFC2.2@8613.08,6430.05 8613.32,6430.29 v1(8666,6430.29)
NetC27_2: C27.2 M4.2 U4.5 | length 1813.2
  Top Layer w12: M4.2@8803.01,5552.91 M4.2@8803.95,5553.85 ; M4.2@8803.95,5551.97 8803.95,5505.91 8841.1,5468.75 v1(8841.1,4048.36)
  Bottom Layer w12: U4.5@8625.03,4020.16 8625.03,4046.36 8632.06,4053.39 8706.5,4053.39 ; C27.2@8706.5,4094.97 8706.5,4047.7 8706.68,4047.53 8840.27,4047.53 v1(8841.1,4048.36)
NetC32_1: C32.1 U5.11 Y1.1 | length 617.5
  Bottom Layer w6: U5.11@7690.91,4898.21 7690.91,4867.83 7730.06,4828.68 7730.06,4755.65 7737.82,4747.89 7844.93,4747.89 7872.63,4720.19 8011.52,4720.19 8019.53,4712.18 C32.1@8019.53,4649.9 8018.39,4651.05 Y1.1@7931.07,4651.05
NetC33_2: C33.2 U5.12 Y1.4 | length 359.1
  Bottom Layer w6: U5.12@7671.23,4898.21 7671.23,4862.73 7718.06,4815.9 7718.06,4717.96 7714.11,4714 C33.2@7714.11,4651.13 7714.19,4651.05 Y1.4@7805.08,4651.05
NetC36_1: C36.1 R35.1 R36.2 U6.4 | length 351.8
  Bottom Layer w6: R36.2@6472.83,1894.77 C36.1@6613.48,1894.77 6691.09,1894.77 6692.54,1893.32 U6.4@6692.54,1761.83
NetC36_2: C36.2 C37.1 L1.2 R36.1 RFC4.1 | length 1462.5
  Bottom Layer w30: R36.1@6472.83,1984.77 L1.2@6472.83,2197.77 RFC4.1@6617.36,2197.77 ; C36.2@6613.48,1984.77 6613.48,2041.39 ; RFC4.1@6619.83,2200.25 RFC4.1@6617.36,2197.77 ; C37.1@7041.84,1505.42 7041.84,1605.13 7024.26,1622.7 6844.23,1622.7 6826.66,1640.28 6826.66,1785.12 6747.52,1864.25 6747.52,2023.46 6729.6,2041.39 6613.48,2041.39 ; 6613.48,2041.39 6613.48,2193.89 RFC4.1@6617.36,2197.77
NetC38_1: C38.1 M49.1 RFC4.2 | length 558.5
  Bottom Layer w30: M49.1@6662.69,2398.33 6688.79,2398.33 6706.36,2380.75 6706.36,2215.34 6723.94,2197.77 RFC4.2@6826.87,2197.77 6829.09,2195.55 C38.1@6829.09,1984.31
NetC39_1: C39.1 Q2.1 Q2a.1 R37.2 R38.1 | length 389.3
  Bottom Layer w6: Q2a.1@5800.67,1580.66 5900.61,1580.66 5900.86,1580.41 ; R37.2@5900.57,1625.29 5900.86,1625 5900.86,1580.41 ; Q2.1@5900.86,1336.37 5900.86,1580.41
NetC43_1: C43.1 R44.1 | length 89.9
  Bottom Layer w6: R44.1@4734.39,5832.62 C43.1@4824.25,5832.62
NetC52_2: C52.2 M51.2 U9.5 | length 1342.3
  Top Layer w12: v1(5051.18,2666.34) M51.2@5051.18,2705.42
  Bottom Layer w12: v1(5051.18,2666.34) 5051.18,2248.03 5078.74,2220.47 5163.39,2220.47 5192.91,2190.95 5192.91,1853.35 5174.21,1834.65 5174.21,1704.46 ; U9.5@5055.12,1668.31 5058.96,1672.15 5058.96,1698.4 5065.99,1705.43 5173.24,1705.43 5174.21,1704.46 ; C52.2@5240.16,1682.45 5196.23,1682.45 5174.21,1704.46
NetC53_2: C53.2 U9.1 U10.9 | length 568.1
  Bottom Layer w12: U10.9@4670.67,1770.67 4670.67,1826.18 4682.09,1837.6 4938.11,1837.6 ; C53.2@4938.11,1772.45 4938.11,1837.6 ; U9.1@5055.12,1774.61 5054.13,1775.59 5054.13,1830.57 5047.1,1837.6 4938.11,1837.6
NetC56_2: C56.2 M53.1 M54.1 U12.1 U12.4 U12.10 U12.13 U12.14 | length 962.2
  Top Layer w12: v1(1207.25,2886.76) 1208.17,2886.76 1220.28,2898.87 v1(1313.41,2898.87)
  Bottom Layer w12: M54.1@1087.72,2633.56 1087.5,2633.78 C56.2@1087.5,2740.6 1087.64,2740.46 U12.14@1188.72,2740.46 ; M53.1@1188.72,3053.97 U12.1@1188.72,2960.46 1188.72,2886.76 ; v1(1207.25,2886.76) 1188.72,2886.76 ; U12.13@1238.72,2740.46 U12.14@1188.72,2740.46 ; v1(1313.41,2898.87) 1333.31,2898.87 ; U12.4@1338.72,2960.46 1338.72,2865.35 1388.72,2815.35 U12.10@1388.72,2740.46 ; U12.14@1188.72,2740.46 1188.72,2886.76
NetC61_2: C61.2 RFC7.1 U13.4 | length 874.4
  Top Layer w12: v1(1158.6,1916.14) 1158.6,1953.54 1175.53,1970.47 1399.41,1970.47 1406.44,1977.5 1406.44,2058.21 1426.97,2078.74 v1(1499.98,2078.74)
  Bottom Layer w12: v1(1158.6,1916.14) 1206.36,1868.38 1206.36,1721.38 1213.39,1714.35 U13.4@1256.65,1714.35 ; v1(1499.98,2078.74) 1534.13,2078.74 1537.09,2081.69 ; C61.2@1529.94,2026.26 1537.09,2033.4 1537.09,2081.69 ; RFC7.1@1537.09,2113.7 1537.09,2081.69
NetC62_1: C62.1 M59.1 U14.1 | length 446.5
  Top Layer w6: v1(1499.98,1865.15) M59.1@1499.98,1915.07
  Bottom Layer w6: U14.1@1269.24,1885.57 1269.24,1860.02 1272.75,1856.51 1367.15,1856.51 1396.27,1885.62 1499.98,1885.62 ; v1(1499.98,1865.15) 1499.98,1885.81 1530.22,1885.81 1533.73,1882.3 C62.1@1533.73,1811.38
NetCC7_2: CC7.2 U1.7 | length 597.9
  Bottom Layer w6: U1.7@5181.87,3817.39 5393.04,3817.39 5396.56,3820.9 5396.56,3874.85 5469.71,3948 5469.71,3998.82 5494.45,4023.56 5494.45,4099.91 5497.96,4103.43 CC7.2@5555.17,4103.43
NetCC8_2: CC8.2 U1.8 | length 533
  Bottom Layer w6: U1.8@5181.87,3797.71 5402.97,3797.71 5409.75,3804.49 5409.75,3871.08 5481.71,3943.03 5481.71,3992.06 5508.55,4018.9 CC8.2@5555.57,4018.9
NetCC14_2: CC14.2 CC14E.1 CC30.2 RFC1.2 U1.14 U1.30 | length 2142.4
  Bottom Layer w12: CC30.2@4482.19,3832.61 4612.27,3832.61 4627.5,3817.39 U1.30@4819.67,3817.39 4961.64,3817.39 5089.35,3689.68 5089.35,3598.08 5117.08,3570.35 5494.45,3570.35 5519.11,3595.01 CC14.2@5555.15,3595.03 5555.23,3594.9 5593.62,3594.9 5599.74,3601.03 5599.74,4174.93 5608.11,4183.3 RFC1.2@5644.42,4183.3 5768.86,4183.3 5786.7,4165.46 CC14E.1@5786.7,4087.4
NetCC15_2: CC15.2 U1.15 | length 572.1
  Bottom Layer w6: U1.15@5069.67,3646.13 5069.67,3589.33 5105.02,3553.97 5460.36,3553.97 5498.64,3515.68 CC15.2@5554.42,3515.68
NetCC16_2: CC16.2 U1.16 | length 671.4
  Bottom Layer w6: U1.16@5049.98,3646.13 5049.98,3576.59 5084.96,3541.61 5455.75,3541.61 5481.54,3515.81 5481.54,3448.02 5492.26,3437.3 CC16.2@5554.42,3437.3
NetCC17_2: CC17.2 CC17E.1 U1.17 | length 1205.2
  Top Layer w6: v1(5494.45,3209.87) v1(5494.45,3294.56)
  Bottom Layer w6: U1.17@5030.3,3646.13 5030.3,3572.43 5073.12,3529.61 5447.78,3529.61 5467.84,3509.55 5467.84,3434.07 5494.45,3407.46 5494.45,3358.34 ; CC17E.1@5298,3099.3 5379.34,3099.3 5382.85,3102.82 5382.85,3193.73 5396.56,3207.44 5492.02,3207.44 v1(5494.45,3209.87) ; v1(5494.45,3294.56) 5494.45,3358.34 ; CC17.2@5554.72,3354.83 5497.96,3354.83 5494.45,3358.34
NetCC18_1: CC18.1 CC18E.1 U1.18 | length 971.9
  Top Layer w6: v1(5339.81,3188.11) v1(5339.81,3297.3)
  Bottom Layer w6: U1.18@5010.61,3646.13 5010.61,3569.11 5062.12,3517.61 5170.7,3517.61 5196.16,3492.15 5196.16,3408.95 5219.06,3386.05 5273.04,3386.05 5284.25,3374.83 5284.25,3344.07 5287.77,3340.55 CC18.1@5339.81,3340.55 v1(5339.81,3297.3) ; CC18E.1@5152.95,3099.3 5152.95,3147.42 5156.47,3150.94 5302.64,3150.94 v1(5339.81,3188.11)
NetCC19_2: CC19.2 CC19E.1 U1.19 | length 966
  Top Layer w6: v1(5251.21,3297.3) 5251.26,3297.26 5251.26,3188.15 v1(5251.3,3188.11)
  Bottom Layer w6: U1.19@4990.93,3646.13 4990.93,3565.79 5053.44,3503.28 5168.05,3503.28 5184.16,3487.18 5184.16,3397.68 5203.32,3378.51 5203.32,3351.13 5214.01,3340.45 CC19.2@5251.21,3340.45 v1(5251.21,3297.3) ; CC19E.1@5010.61,3099.3 5010.61,3156.79 5020.27,3166.45 5229.65,3166.45 v1(5251.3,3188.11)
NetCC20_1: CC20.1 CC20E.1 U1.20 | length 991.2
  Top Layer w6: v1(5171.82,3190.05) v1(5171.82,3297.3)
  Bottom Layer w6: CC20E.1@4865.43,3099.3 4866.63,3100.5 4866.63,3174.16 4871.84,3179.36 5140.83,3179.36 5151.51,3190.05 v1(5171.82,3190.05) ; U1.20@4971.24,3646.13 4971.24,3566.13 5049.74,3487.63 5160.46,3487.63 5171.82,3476.27 CC20.1@5171.82,3338.68 v1(5171.82,3297.3)
NetCC23_2: CC23.2 U1.23 | length 445.7
  Bottom Layer w6: CC23.2@4768.6,3338.68 4768.6,3418.41 4774.12,3423.93 4908.67,3423.93 4912.19,3427.44 U1.23@4912.19,3646.13